# Altium PCB Kill_board.PcbDoc
Units mil, origin at the board's own origin, x right, y up, seen from the top; angles counter-clockwise.
Board outline 6000 x 4000 mil, 2 copper layers (Top Layer, Bottom Layer); 94 components, 95 nets, 218 pads, 0 vias.
Unrouted connection lines stored in the file: 136.
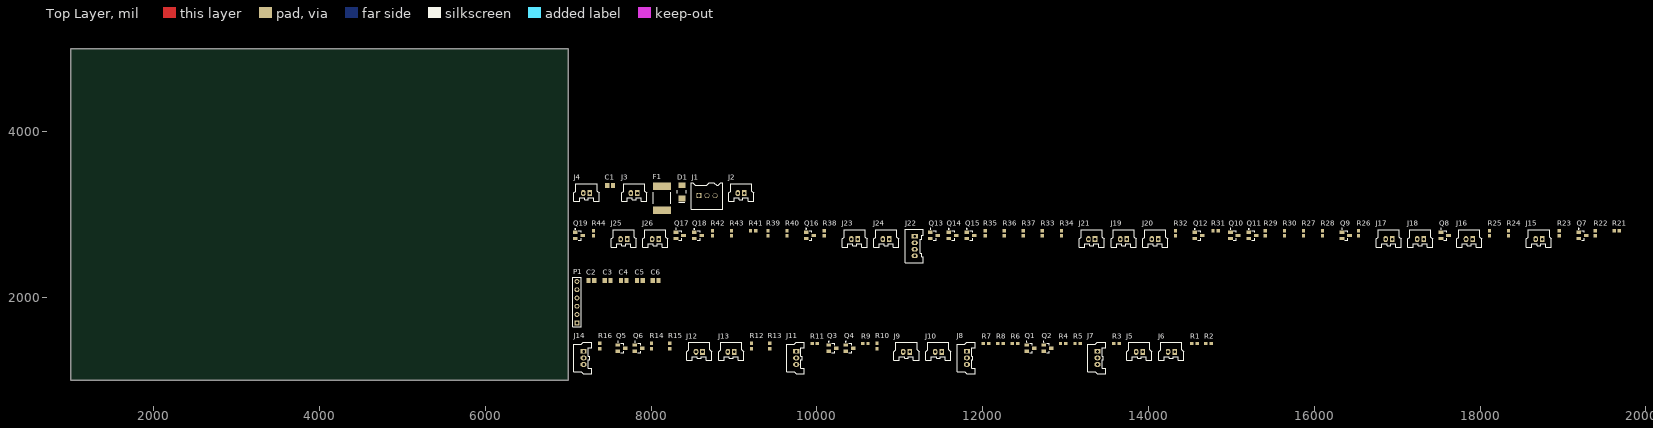
[diagram p0: Top Layer view]
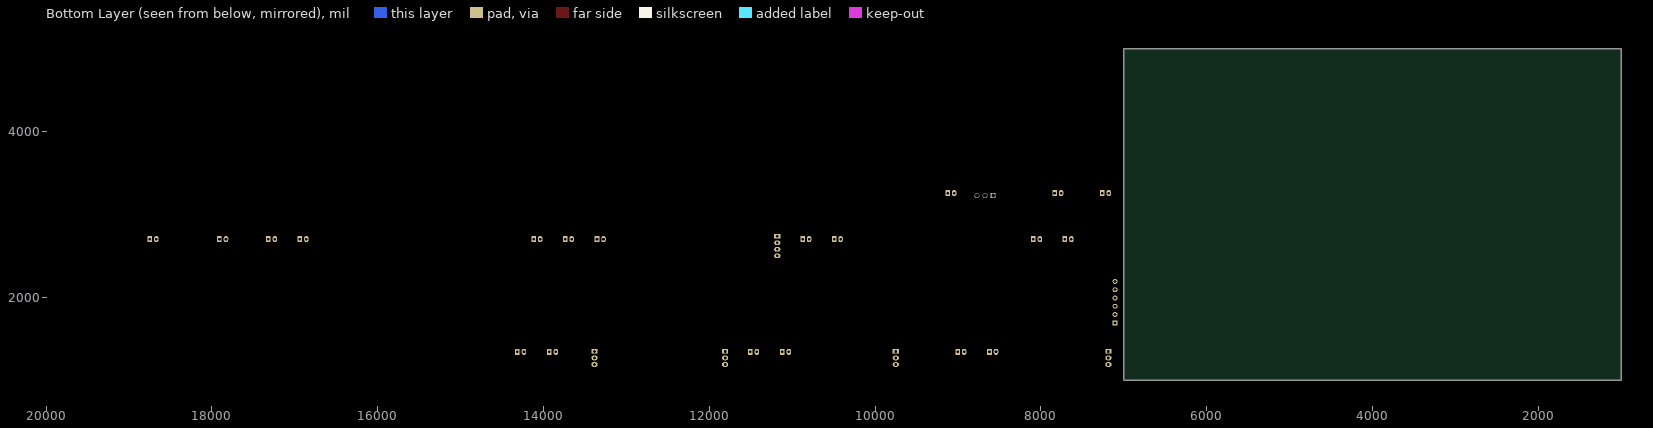
[diagram p1: Bottom Layer view, seen from below]

## Layer stack, top to bottom
Top Solder: solder mask 0.4, Solder Resist, Dk 3.5
Top Layer: signal copper 1.4
Dielectric 1: dielectric 12.6, FR-4, Dk 4.8
Bottom Layer: signal copper 1.4
Bottom Solder: solder mask 0.4, Solder Resist, Dk 3.5

## Board outline
1000,1000 7000,1000 7000,5000 1000,5000

## Design rules (kind name [scope] priority, off if disabled: settings)
Clearance [All] p1: gap=10 ignorepadtopadclearanceinfootprint=FALSE except(0: Arc-Hole Track-Hole SMDPad-Hole THPad-Hole Via-Hole Fill-Hole Poly-Hole Region-Hole Text-Hole)
PolygonConnect [All] p1: connectstyle=Relief reliefconductorwidth=10 reliefentries=4 polygonreliefangle="90 Angle" airgapwidth=10
RoomDefinition Power [InComponentClass('Power')] p1: confinementstyle=ConfineIn formatcopy=TRUE lockcomponents=FALSE outline 7045,3000 9260,3000 9260,3500 7045,3500
RoomDefinition Output [InComponentClass('Output')] p2: confinementstyle=ConfineIn formatcopy=TRUE lockcomponents=FALSE outline 7045,2400 19755,2400 19755,2945 7045,2945
RoomDefinition MCU [InComponentClass('MCU')] p3: confinementstyle=ConfineIn formatcopy=TRUE lockcomponents=FALSE outline 7045,1635 8135,1635 8135,2355 7045,2355
RoomDefinition Input [InComponentClass('Input')] p4: confinementstyle=ConfineIn formatcopy=TRUE lockcomponents=FALSE outline 7045,1060 14795,1060 14795,1585 7045,1585
RoutingVias [All] p1: holewidth=28 width=50 viastyle="Through Hole" minholewidth=28 minwidth=50 maxholewidth=28 maxwidth=50
SolderMaskExpansion [All] p1: expansion=4 istentingtop=FALSE
Width [All] p1: maxlimit=10 minlimit=10 preferedwidth=10
30 further rules are at their usual default settings.

## Classes and differential pairs
component class Power: C1 D1 F1 J1 J2 J3 J4 PS1 PS2
component class Output: J15 J16 J17 J18 J19 J20 J21 J22 J23 J24 J25 J26 Q7 Q8 Q9 Q10 Q11 Q12 Q13 Q14 Q15 Q16 Q17 Q18 Q19 R21 R22 R23 R24 R25 R26 R27 R28 R29 R30 R31 R32 R33 R34 R35 R36 R37 R38 R39 R40 R41 R42 R43 R44
component class MCU: C2 C3 C4 C5 C6 P1 R17 R18 R19 R20 S1 U1 U2
component class Input: J5 J6 J7 J8 J9 J10 J11 J12 J13 J14 Q1 Q2 Q3 Q4 Q5 Q6 R1 R2 R3 R4 R5 R6 R7 R8 R9 R10 R11 R12 R13 R14 R15 R16

## Components (designator, comment, footprint, x,y, rotation, side; value= is the part's Value field where it differs from the comment)
C1 "Cap" CAPC0805 7505,3350 r0 top value=10uF
C2 "Cap" CAPC0805 7280,2205 r0 top value=1uF
C3 "Cap" CAPC0805 7475,2205 r0 top value=1uF
C4 "Cap" CAPC0805 7670,2205 r0 top value=1uF
C5 "Cap" CAPC0805 7865,2205 r0 top value=1uF
C6 "Cap" CAPC0805 8055,2205 r0 top value=0.01uF
D1 "VS-15MQ040NTRPBF" SS110-TP 8370,3275 r90 top
F1 "PTC Fuse" PTC7451X11N 8130,3200 r90 top value=1.1A
J1 "24V IN" MCV_0,5/3-G-2,5 8575,3230 r0 top
J2 "24V OK" MOLEX-HDR-1X2-SHERLOCK-VERT 9125,3260 r0 top
J3 "5V OK" MOLEX-HDR-1X2-SHERLOCK-VERT 7835,3260 r0 top
J4 "3V3 OK" MOLEX-HDR-1X2-SHERLOCK-VERT 7260,3260 r0 top
J5 "PORT F KILL IND" MOLEX-HDR-1X2-SHERLOCK-VERT 13930,1345 r0 top
J6 "STBD F KILL IND" MOLEX-HDR-1X2-SHERLOCK-VERT 14315,1345 r0 top
J7 "PORT F KILL" MOLEX-HDR-1X3-SHERLOCK-VERT 13385,1350 r90 top
J8 "PORT A KILL" MOLEX-HDR-1X3-SHERLOCK-VERT 11810,1350 r90 top
J9 "PORT F KILL IND" MOLEX-HDR-1X2-SHERLOCK-VERT 11120,1345 r0 top
J10 "STBD F KILL IND" MOLEX-HDR-1X2-SHERLOCK-VERT 11505,1345 r0 top
J11 "STBD F KILL" MOLEX-HDR-1X3-SHERLOCK-VERT 9750,1350 r90 top
J12 "PORT A KILL IND" MOLEX-HDR-1X2-SHERLOCK-VERT 8620,1345 r0 top
J13 "STBD A KILL IND" MOLEX-HDR-1X2-SHERLOCK-VERT 9005,1345 r0 top
J14 "STBD A KILL" MOLEX-HDR-1X3-SHERLOCK-VERT 7185,1350 r90 top
J15 "RED IND" MOLEX-HDR-1X2-SHERLOCK-VERT 18750,2705 r0 top
J16 "KILL IND" MOLEX-HDR-1X2-SHERLOCK-VERT 17910,2705 r0 top
J17 "THRST 0 RELAY" MOLEX-HDR-1X2-SHERLOCK-VERT 16940,2705 r0 top
J18 "THRST 1 RELAY" MOLEX-HDR-1X2-SHERLOCK-VERT 17320,2705 r0 top
J19 "THRST 2 RELAY" MOLEX-HDR-1X2-SHERLOCK-VERT 13740,2705 r0 top
J20 "THRST 3 RELAY" MOLEX-HDR-1X2-SHERLOCK-VERT 14120,2705 r0 top
J21 "YELLOW IND" MOLEX-HDR-1X2-SHERLOCK-VERT 13355,2705 r0 top
J22 "STACK LIGHT" MOLEX-HDR-1X4-SHERLOCK-VERT 11180,2740 r90 top
J23 "THRST 4 RELAY" MOLEX-HDR-1X2-SHERLOCK-VERT 10495,2705 r0 top
J24 "THRST 5 RELAY" MOLEX-HDR-1X2-SHERLOCK-VERT 10875,2705 r0 top
J25 "GREEN IND" MOLEX-HDR-1X2-SHERLOCK-VERT 7710,2705 r0 top
J26 "HORN RELAY" MOLEX-HDR-1X2-SHERLOCK-VERT 8090,2705 r0 top
P1 "JTAG" HDR1X6 7105,1695 r90 top
Q1 "MMBT3904" MMBT3904 12575,1390 r0 top
Q2 "MMBT3904" MMBT3904 12780,1390 r0 top
Q3 "MMBT3904" MMBT3904 10190,1390 r0 top
Q4 "MMBT3904" MMBT3904 10395,1390 r0 top
Q5 "MMBT3904" MMBT3904 7645,1390 r0 top
Q6 "MMBT3904" MMBT3904 7850,1390 r0 top
Q7 "MMBT3904" MMBT3904 19235,2750 r0 top
Q8 "MMBT3904" MMBT3904 17575,2750 r0 top
Q9 "MMBT3904" MMBT3904 16380,2750 r0 top
Q10 "MMBT3904" MMBT3904 15035,2750 r0 top
Q11 "MMBT3904" MMBT3904 15255,2750 r0 top
Q12 "MMBT3904" MMBT3904 14605,2750 r0 top
Q13 "MMBT3904" MMBT3904 11415,2750 r0 top
Q14 "MMBT3904" MMBT3904 11635,2750 r0 top
Q15 "MMBT3904" MMBT3904 11855,2750 r0 top
Q16 "MMBT3904" MMBT3904 9915,2750 r0 top
Q17 "MMBT3904" MMBT3904 8345,2750 r0 top
Q18 "MMBT3904" MMBT3904 8565,2750 r0 top
Q19 "MMBT3904" MMBT3904 7130,2750 r0 top
R1 "Res" RES0603 14555,1445 r0 top value=???
R2 "Res" RES0603 14725,1445 r0 top value=???
R3 "Res" RES0603 13615,1445 r0 top value=???
R4 "Res" RES0603 12970,1445 r0 top value=???
R5 "Res" RES0603 13145,1445 r0 top value=???
R6 "Res" RES0603 12390,1445 r0 top value=???
R7 "Res" RES0603 12040,1445 r0 top value=???
R8 "Res" RES0603 12215,1445 r0 top value=???
R9 "Res" RES0603 10585,1445 r0 top value=???
R10 "Res" RES0603 10725,1415 r90 top value=???
R11 "Res" RES0603 9975,1445 r0 top value=???
R12 "Res" RES0603 9210,1415 r90 top value=???
R13 "Res" RES0603 9430,1415 r90 top value=???
R14 "Res" RES0603 8005,1415 r90 top value=???
R15 "Res" RES0603 8225,1415 r90 top value=???
R16 "Res" RES0603 7380,1415 r90 top value=???
R21 "Res" RES0603 19650,2805 r0 top value=10k
R22 "Res" RES0603 19390,2775 r90 top value=???
R23 "Res" RES0603 18955,2775 r90 top value=???
R24 "Res" RES0603 18345,2775 r90 top value=???
R25 "Res" RES0603 18115,2775 r90 top value=???
R26 "Res" RES0603 16535,2775 r90 top value=???
R27 "Res" RES0603 15870,2775 r90 top value=10k
R28 "Res" RES0603 16100,2775 r90 top value=10k
R29 "Res" RES0603 15410,2775 r90 top value=???
R30 "Res" RES0603 15640,2775 r90 top value=???
R31 "Res" RES0603 14810,2805 r0 top value=???
R32 "Res" RES0603 14325,2775 r90 top value=???
R33 "Res" RES0603 12720,2775 r90 top value=10k
R34 "Res" RES0603 12950,2775 r90 top value=10k
R35 "Res" RES0603 12030,2775 r90 top value=???
R36 "Res" RES0603 12260,2775 r90 top value=???
R37 "Res" RES0603 12490,2775 r90 top value=???
R38 "Res" RES0603 10090,2775 r90 top value=???
R39 "Res" RES0603 9410,2775 r90 top value=10k
R40 "Res" RES0603 9640,2775 r90 top value=10k
R41 "Res" RES0603 9230,2805 r0 top value=???
R42 "Res" RES0603 8740,2775 r90 top value=???
R43 "Res" RES0603 8970,2775 r90 top value=???
R44 "Res" RES0603 7305,2775 r90 top value=???

## Footprints (in the part's own frame and the unit in brackets; to place one, negate y for a bottom-side part, rotate by r counter-clockwise, add the part's x,y. Pads: shape width x height; smd on the part's side, far side on the other; paste and mask are expansions set on the pad)
CAPC0805 [mm] "Chip Capacitor, 2-Leads, Body 2.01x1.25mm, IPC Medium Density"
  rect 1.3x1.5 smd: 1(-0.875,0) 2(0.875,0)
  body extent -1.1,-0.72 1.11,0.72, height 1.8
HDR1X6 [mm] "Connector; Header; 6 Position"
  rect 1.5x1.5 hole 0.9: 1(0,0)
  round 1.5 hole 0.9: 2(2.54,0) 3(5.08,0) 4(7.62,0) 5(10.16,0) 6(12.7,0)
  silkscreen extent -1.27,-1.27 13.97,1.27
MCV_0,5/3-G-2,5 [mil] "CONN TERM BLOCK 2.50MM 3POS"
  rect 60x60 hole 47.24: 1(0,0)
  round 60 hole 47.24: 2(98.43,0) 3(196.85,0)
  silkscreen extent -90,-167 286,156, body extent -87,-165 283,154, height 398
MMBT3904 [mm] "SOT23, 3-Leads, Body 2.92x2.40mm, Pitch 0.95mm, IPC Medium Density"
  rect 1.4x1 smd: B(-1.15,0.95) C(1.15,0) E(-1.15,-0.95)
  silkscreen extent -1.27,-1.45 0.65,2.12, body extent -0.65,-1.46 0.65,1.46, height 1.2
MOLEX-HDR-1X2-SHERLOCK-VERT [mm]
  rect 1.397x1.905 hole 0.8: 1(0,0)
  oval 1.397x1.905 hole 0.8: 2(-2,0)
  silkscreen extent -4.85,-2.55 2.85,2.95, body extent -4.87,-2.59 2.83,2.96, height 8.5
MOLEX-HDR-1X3-SHERLOCK-VERT [mm]
  rect 1.397x1.905 hole 0.8: 1(0,0)
  oval 1.397x1.905 hole 0.8: 2(-2,0) 3(-4,0)
  silkscreen extent -6.85,-2.55 2.85,2.95, body extent -6.88,-2.57 2.82,2.98, height 8.57
MOLEX-HDR-1X4-SHERLOCK-VERT [mm]
  rect 1.397x1.905 hole 0.8: 1(0,0)
  oval 1.397x1.905 hole 0.8: 2(-2,0) 3(-4,0) 4(-6,0)
  silkscreen extent -8.15,-2.55 2.15,2.95, body extent -8.13,-2.57 2.17,2.98, height 8.5
PTC7451X11N [mm] "Chip PTC, 2920, 7351 metric 2-Leads, Body 7.36x5.12mm, IPC Medium Density"
  rect 2.3x5.6 smd: 1(-3.7,0) 2(3.7,0)
  silkscreen extent -1.75,-2.7 1.75,2.7, body extent -3.99,-2.72 3.99,2.72, height 1.15
RES0603 [mm] "Chip Resistor, 2-Leads, Body 1.60x0.80mm, IPC Medium Density"
  rect 1.05x1 smd: 1(-0.8,0) 2(0.8,0)
  body extent -0.88,-0.48 0.87,0.47, height 0.8
SS110-TP [mil] "DIODE SCHOTTKY 100V 1A SMA"
  rect 70x85 smd: A(80,0) C(-80,0)
  silkscreen extent -127,-53 18,53, body extent -84,-52 84,52, height 116

## Part data
C1 C2 C3 C4 C5 C6: Supplier Part Number 1=490-3905-1-ND, Supplier 1=Digi-Key
D1: "DIODE SCHOTTKY 40V 1.5A SMA", Manufacturer 1="Vishay Semiconductor Diodes Division", Supplier Part Number 1=15MQ040NPBFCT-ND, Manufacturer Part Number 1=VS-15MQ040NTRPBF, Supplier 1=Digi-Key
F1: library part PTC_Fuse, Supplier Part Number 1=507-1744-1-ND, Supplier 1=Digi-Key
J1: library part MCV_0,5/3-G-2,5, "CONN TERM BLOCK 2.50MM 3POS, Vertical, Through-Hole, 4A", Manufacturer 1="Phoenix Contact", Manufacturer Part Number 1=1881561, Supplier Part Number 1=277-1453-ND, Mating Connector=277-1431-ND, Supplier 1=Digi-Key
J2 J3 J4 J5 J6 J9 J10 J12 J13 J15 J16 J17 J18 J19 J20 J21 J23 J24 J25 J26: library part MOLEX-HDR-1x2-SHERLOCK_VERT, "Header, Molex, 2mm Pitch Sherlock Header, Single Row, Vertical, 2 Circuits, Length 3.3mm, 0353620250"
J7 J8 J11 J14: library part MOLEX-HDR-1x3-SHERLOCK_VERT, "Header, Molex, 2mm Pitch Sherlock Header, Single Row, Vertical, 3 Circuits, Length 3.3mm, 0353620376"
J22: library part MOLEX-HDR-1x4-SHERLOCK_VERT, "Header, Molex, 2mm Pitch Sherlock Header, Single Row, Vertical, 4 Circuits, Length 3.3mm, 0353620450"
P1: library part "Header 6", "Header, 6-Pin", LatestRevisionDate=17-Jul-2002, LatestRevisionNote="Re-released for DXP Platform.", Publisher="Altium Limited"
Q1 Q2 Q3 Q4 Q5 Q6 Q7 Q8 Q9 Q10 Q11 Q12 Q13 Q14 Q15 Q16 Q17 Q18 Q19: "TRANS NPN 40V 0.2A SOT-23", Manufacturer 1="Fairchild Semiconductor", Supplier Part Number 1=MMBT3904FSCT-ND, Manufacturer Part Number 1=MMBT3904, Supplier 1=Digi-Key
R1 R2 R3 R4 R5 R6 R7 R8 R9 R10 R11 R12 R13 R14 R15 R16 R21 R22 R23 R24 R25 R26 R27 R28 R29 R30 R31 R32 R33 R34 R35 R36 R37 R38 R39 R40 R41 R42 R43 R44: Supplier Part Number 1=RMCF0603JT10K0CT-ND, Supplier 1=Digi-Key

## Nets (pads, with @x,y where several pads share a name; then routed paths per layer and width w, separated by ;. In a path a pad name is that pad's centre, name@x,y a point inside that pad or via, vN(x,y) a via of type N, cw(c..) or ccw(c..) an arc to the next point about the centre after c; other vN are vias at no path point)
3.3v: R21.1
5V: C1.1 J3.1
24V: F1.1 J2.1 J17.1 J18.1 J19.1 J20.1 J22.1 J23.1 J24.1 J26.1
CAN_RX0: 
CAN_TX0: 
CANH_A: 
CANL_A: 
GND: C1.2 C2.2 C3.2 C4.2 C5.2 C6.2 J1.3 J2.2 J3.2 J4.2 J7.3 J8.3 J11.3 J14.3 P1.6 Q1.E Q2.E Q3.E Q4.E Q5.E Q6.E Q7.E Q8.E Q9.E Q12.E Q13.E Q14.E Q15.E Q16.E Q17.E Q18.E Q19.E R27.1 R28.1 R33.1 R34.1 R39.1 R40.1
GREEN: R38.1 R44.1
GREEN_LT: J22.4 Q16.C
HORN_RELAY: J26.2
KILL: R26.1 R27.2 R28.2 R29.1 R30.1 R33.2 R34.2 R36.1 R37.1 R39.2 R40.2 R42.1 R43.1
NetD1_A: D1.A J1.1
NetD1_C: D1.C F1.2
NetJ5_1: J5.1 R1.2
NetJ5_2: J5.2 Q1.C
NetJ6_1: J6.1 R2.2
NetJ6_2: J6.2 Q2.C
NetJ7_1: J7.1 R3.2
NetJ8_1: J8.1 R6.2
NetJ9_1: J9.1 R7.2
NetJ9_2: J9.2 Q3.C
NetJ10_1: J10.1 R8.2
NetJ10_2: J10.2 Q4.C
NetJ11_1: J11.1 R11.2
NetJ12_1: J12.1 R12.2
NetJ12_2: J12.2 Q5.C
NetJ13_1: J13.1 R13.2
NetJ13_2: J13.2 Q6.C
NetJ14_1: J14.1 R16.2
NetJ15_1: J15.1 R23.2
NetJ15_2: J15.2 Q8.C
NetJ16_1: J16.1 R24.2
NetJ16_2: J16.2 Q9.C
NetJ17_2: J17.2 Q10.C
NetJ18_2: J18.2 Q11.C
NetJ19_2: J19.2 Q14.C
NetJ20_2: J20.2 Q15.C
NetJ21_1: J21.1 R32.2
NetJ21_2: J21.2 Q13.C
NetJ23_2: J23.2 Q17.C
NetJ24_2: J24.2 Q18.C
NetJ25_1: J25.1 R41.2
NetJ25_2: J25.2 Q19.C
NetQ1_B: Q1.B R4.2
NetQ2_B: Q2.B R5.2
NetQ3_B: Q3.B R9.2
NetQ4_B: Q4.B R10.2
NetQ5_B: Q5.B R14.2
NetQ6_B: Q6.B R15.2
NetQ7_B: Q7.B R22.2
NetQ8_B: Q8.B R25.2
NetQ9_B: Q9.B R26.2
NetQ10_B: Q10.B R29.2
NetQ10_E: Q10.E Q11.E
NetQ11_B: Q11.B R30.2
NetQ12_B: Q12.B R31.2
NetQ13_B: Q13.B R35.2
NetQ14_B: Q14.B R36.2
NetQ15_B: Q15.B R37.2
NetQ16_B: Q16.B R38.2
NetQ17_B: Q17.B R42.2
NetQ18_B: Q18.B R43.2
NetQ19_B: Q19.B R44.2
NetU2_57: 
NetU2_58: 
NetU2_61: 
NetU2_62: 
NetU2_63: 
NetU2_64: 
NRST: P1.5
PORT_A_KILL_SW: 
PORT_F_KILL_SW: 
RADIO_IN: 
RADIO_OUT: 
RADIO_READY: 
RADIO_SEL: 
RED: R21.2 R22.1 R25.1
RED_LT: J22.2 Q7.C
STBD_A_KILL_SW: 
STBD_F_KILL_SW: 
TCK/SWCLK: P1.1
TDI: P1.3
TDO/SWO: P1.4
THRST_0_KILL_IND: R4.1
THRST_1_KILL_IND: R5.1
THRST_2_KILL_IND: R9.1
THRST_3_KILL_IND: R10.1
THRST_4_KILL_IND: R14.1
THRST_5_KILL_IND: R15.1
TMS/SWDIO: P1.2
VDD: C5.1 C6.1 J4.1 R1.1 R2.1 R3.1 R6.1 R7.1 R8.1 R11.1 R12.1 R13.1 R16.1 R23.1 R24.1 R32.1 R41.1
VDDC: C2.1 C3.1 C4.1
YELLOW: R31.1 R35.1
YELLOW_LT: J22.3 Q12.C
pads on no net: J1.2 J7.2 J8.2 J11.2 J14.2